# Altium PCB PCB_Control.V03.R00.PcbDoc (part 7 of 7)
Units mm, origin at the board's own origin, x right, y up, seen from the top; angles counter-clockwise.
Board outline 188 x 90 mm, 6 copper layers (Top Layer, GND 1, PWR, Signal L4, GND 2, Bottom Layer), stack 1.548 mm thick; 541 components, 265 nets, 1491 pads, 2159 vias.
Unrouted connection lines stored in the file: 819.
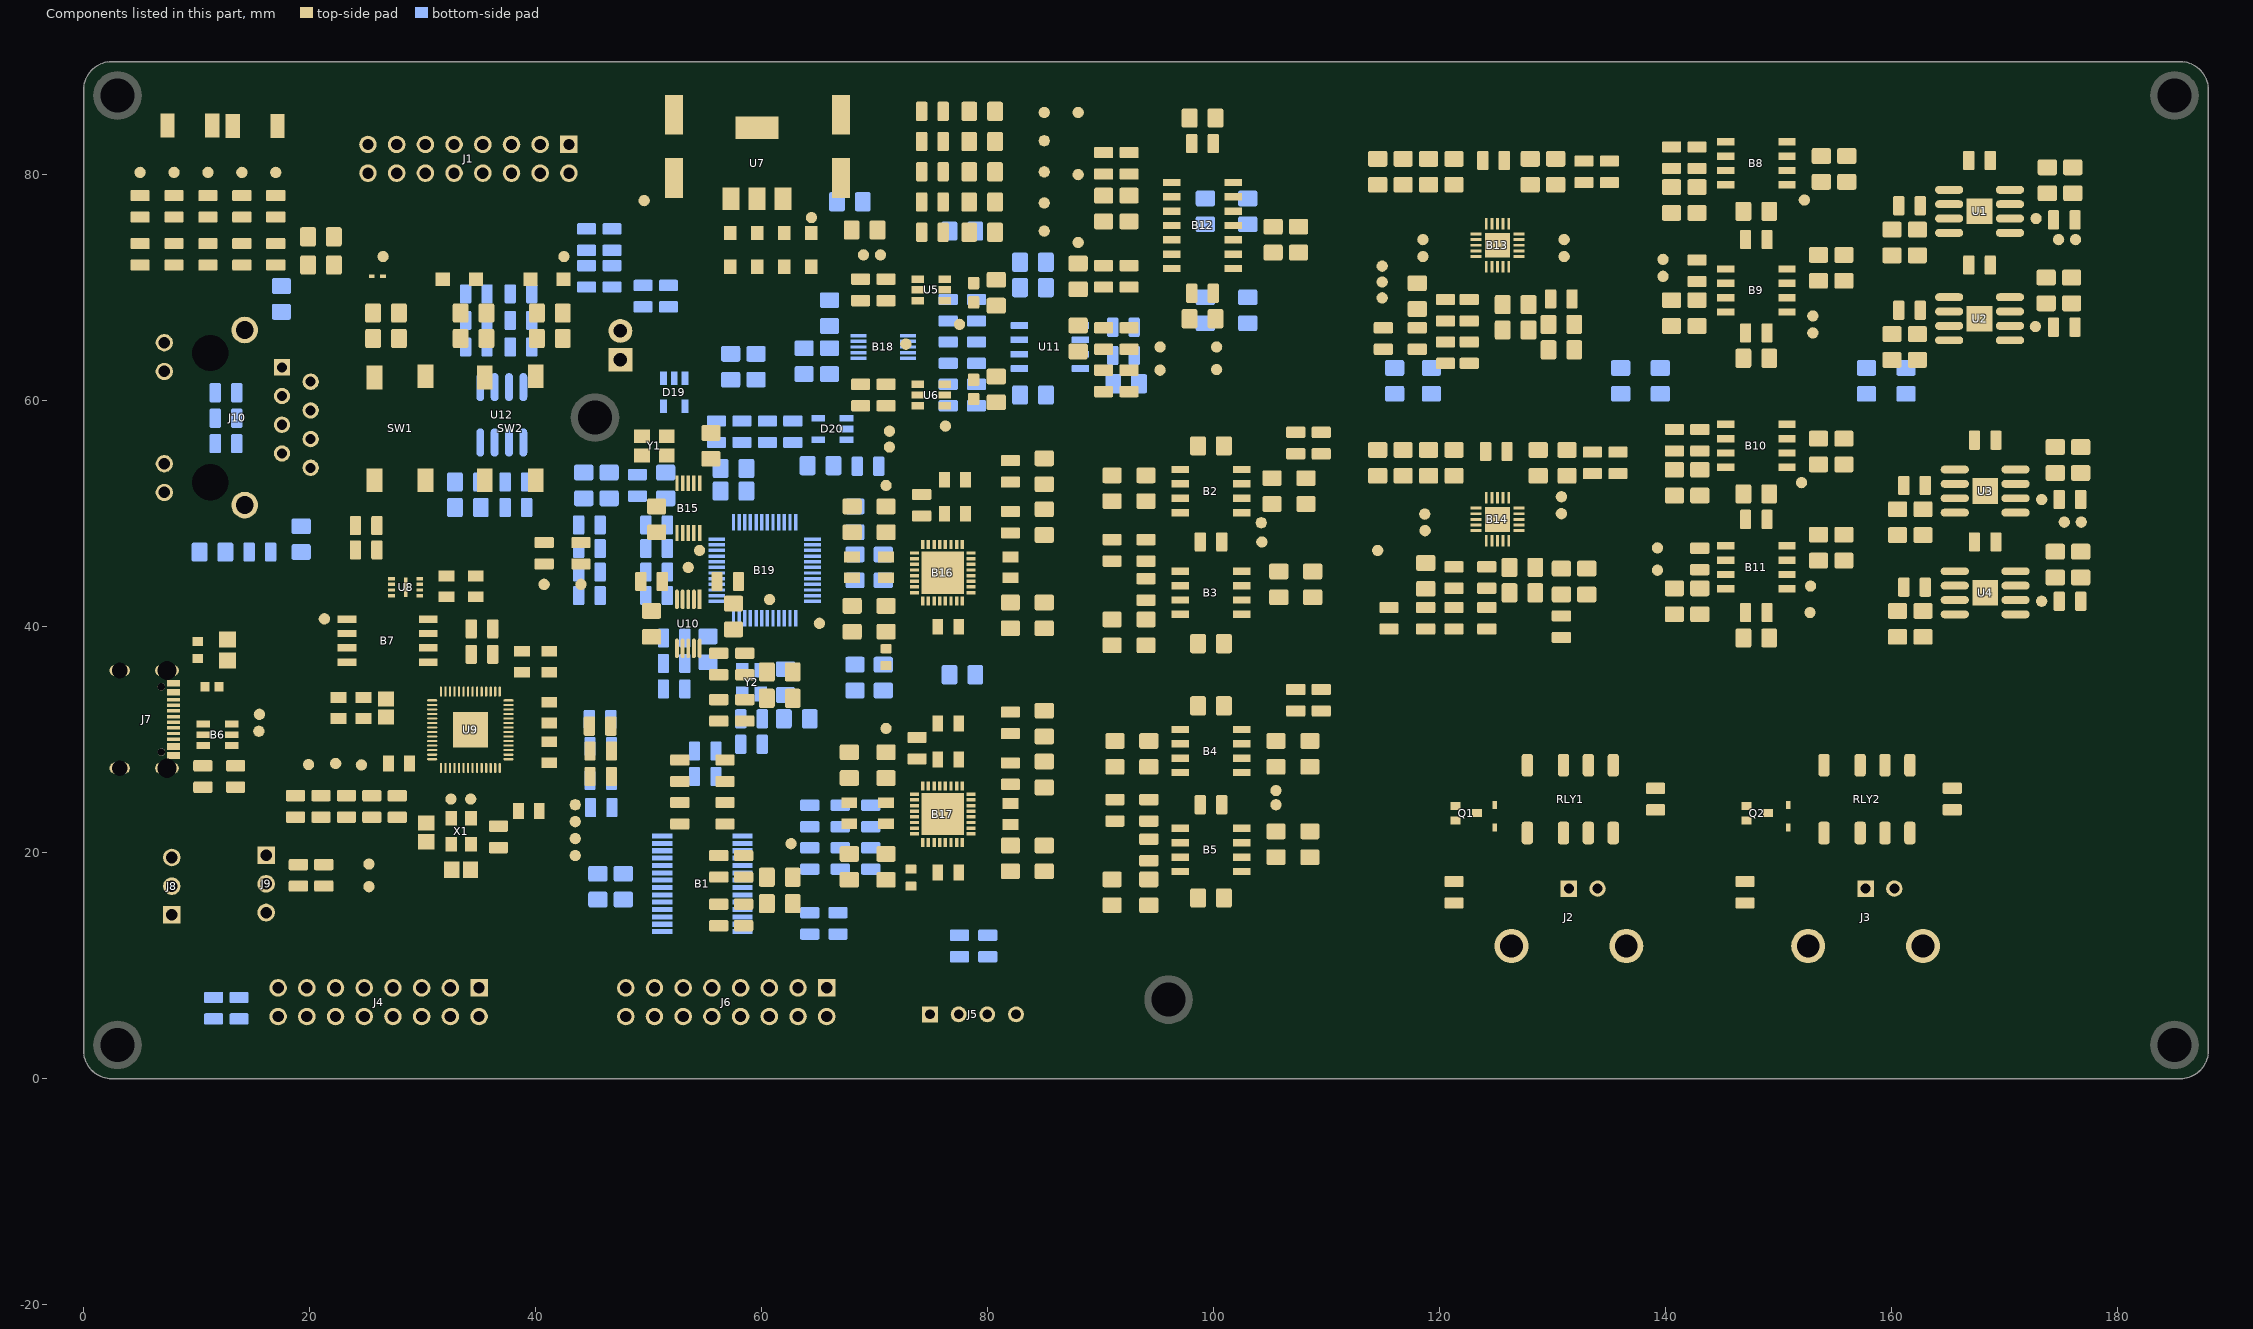
[diagram p10: the components of this part, seen from the top]

## Polygon pours and split planes (outlines as drawn) (continued)
GND on Top Layer "Top Layer-GND 1" (solid, pour order 39): 159.723,23.61 159.808,23.605 159.906,23.585 159.96,23.567 160.015,23.556 160.066,23.531 160.12,23.513 160.167,23.481 160.218,23.456 160.301,23.401 160.344,23.363 160.391,23.332 160.428,23.289 160.471,23.252 160.502,23.204 160.54,23.162 160.595,23.079 160.62,23.028 160.652,22.981 160.67,22.927 160.695,22.876 160.706,22.82 160.725,22.767 160.744,22.669 160.75,22.584 160.761,22.5 160.761,21 160.75,20.916 160.744,20.831 160.725,20.733 160.706,20.68 160.695,20.624 160.67,20.573 160.652,20.519 160.62,20.472 160.595,20.421 160.54,20.338 160.502,20.296 160.471,20.248 160.428,20.211 160.391,20.168 160.344,20.137 160.301,20.099 160.218,20.044 160.167,20.019 160.12,19.987 160.066,19.969 160.015,19.944 159.96,19.933 159.906,19.915 159.834,19.9 159.73,19.732 159.688,19.679 159.651,19.622 159.381,19.306 159.356,19.283 159.335,19.256 158.892,18.814 158.786,18.684 158.709,18.54 158.661,18.383 158.66,18.372 158.826,18.303 159.006,18.166 159.143,17.986 159.23,17.777 159.26,17.553 159.26,16.107 159.23,15.883 159.143,15.674 159.006,15.494 158.826,15.357 158.617,15.27 158.393,15.241 156.947,15.241 156.723,15.27 156.514,15.357 156.334,15.494 156.197,15.674 156.11,15.883 156.081,16.107 156.081,17.553 156.11,17.777 156.197,17.986 156.334,18.166 156.514,18.303 156.706,18.383 156.735,18.68 156.755,18.763 156.768,18.846 156.878,19.206 156.913,19.284 156.943,19.363 157.12,19.695 157.169,19.764 157.214,19.836 157.453,20.127 157.484,20.156 157.51,20.19 157.516,20.195 157.956,20.635 157.967,20.643 158.051,20.746 158.034,20.831 158.029,20.916 158.018,21 158.018,22.5 158.029,22.584 158.034,22.669 158.054,22.767 158.072,22.82 158.083,22.876 158.108,22.927 158.127,22.981 158.158,23.028 158.183,23.079 158.239,23.162 158.276,23.204 158.308,23.252 158.35,23.289 158.388,23.332 158.435,23.363 158.478,23.401 158.56,23.456 158.611,23.481 158.658,23.513 158.712,23.531 158.763,23.556 158.819,23.567 158.873,23.585 158.97,23.605 159.055,23.61 159.139,23.621 159.639,23.621
GND on Top Layer "Top Layer-GND 2" (solid, pour order 36): 518 vertices, not listed, extent 133.968,19.879 179.225,52.977
GND on Top Layer "Top Layer-GND 3" (solid, pour order 35): 489 vertices, not listed, extent 160.218,19.879 181.678,77.727
GND on Top Layer "GND_L01_P034" (solid, remove dead copper, pour order 34): 126,70.1 126.3,69.8 126.5,69.6 126.5,69.4 126.5,64 127,63.5 130.4,63.5 130.9,64 130.9,71.8 130.5,72.2 126,72.2
GND on Top Layer "GND_L01_P026" (solid, remove dead copper, pour order 26): 188,90 0,90 0,87 188,87
GND on Top Layer "GND_L01_P025" (solid, remove dead copper, pour order 25): 188,0 185,0 185,90 188,90
GND on Top Layer "GND_L01_P024" (solid, remove dead copper, pour order 24): 0,0 188,0 188,3 0,3
GND on Bottom Layer "GND_L06_P078" (solid, remove dead copper, pour order 78): 0,90 188,90 188,0 0,0
GND on Bottom Layer "GND_L06_P028" (solid, remove dead copper, pour order 28): 0,0 188,0 188,3 0,3
GND on Bottom Layer "GND_L06_P027" (solid, pour order 27): 0,0 3,0 3,91 0,91
GND on Bottom Layer "GND_L06_P030" (solid, remove dead copper, pour order 30): 188,90 0,90 0,87 188,87
GND on Bottom Layer "GND_L06_P029" (solid, remove dead copper, pour order 29): 188,0 185,0 185,90 188,90
+A5V on PWR "+A5V_L03_P068" (solid, remove dead copper, pour order 68): 154.5,26 152.5,26 150,23.5 150,3 101.1,3 101.1,31 102.6,32.5 129.5,32.5 129.5,27 127.5,25 112.5,25 108.5,21 105,17.5 105,7.5 106.5,6 146,6 147.5,7.5 147.5,26 150.5,29 156,29 156,27.5
+A5V on PWR "+A5V_L03_P066" (solid, remove dead copper, pour order 66): 134.994,76.494 134.994,81.694 135.8,82.5 159.5,82.5 159.5,70 156,66.5 156,29 151.5,29 147.5,25 147.5,79.6 140.1,79.6 139.8,79.3 139.8,40.8 136.5,37.5 103.5,37.5 100.5,40.5 100.5,72.5 106.5,72.5 106.5,63 107.5,62 118.7,62 119.3,62.6 119.3,64.5 118,65.8 118,72.5 120,74.5 133,74.5
+3V3 on PWR "+3V3_L03_P071" (solid, remove dead copper, pour order 71): 18.473,62.973 13.696,67.75 3.25,67.75 3.25,54 4.5,52.75 16.75,52.75 18,51.5 18,23 12,17 12,10.5 72,10.5 72,61.5 56.5,61.5 53.5,58.5 42,58.5 37.5,63 18.5,63
-A15V on PWR "-A15V_L03_P067" (solid, remove dead copper, pour order 67): 156,37.5 167.5,37.5 167.5,84.5 103.5,84.5 101.5,82.5 101.5,77 99.5,75 75.5,75 75.5,72.75 106.5,72.75 106.5,63 107.5,62 119.3,62 119.3,79.8 121.5,82 159.5,82 159.5,69.743 156,66.243
-A5V on PWR "-A5V_L03_P065" (solid, remove dead copper, pour order 65): 88,13.5 100.7,13.5 100.7,29.8 103.4,32.5 147.5,32.5 147.5,79.5 140.5,79.5 139.5,78.5 139.5,40 137,37.5 103,37.5 101.1,39.4 101.1,72.5 96,72.5 94.5,71 94.5,55.5 90,55.5 88,53.5
+A15V on PWR "+A15V_L03_P045" (solid, remove dead copper, pour order 45): 179,43.5 168,43.5 168,84.5 103.5,84.5 101.5,82.5 101.5,77 99.5,75 75.5,75 75.5,78.5 92.5,78.5 92.5,87 179,87
+A3V3 on PWR "+A3V3_L03_P069" (solid, remove dead copper, pour order 69): 87.8,53.5 89.9,55.6 93.1,55.6 94.3,56.8 94.3,61 77,61 74,58 74,36.5 77.5,36.5 79.5,38.5 79.5,49 80.5,50 83,50 83,36.5 78.5,32 75.5,32 74,30.5 74,21 75,20 75,17.5 79.5,17.5 79.5,26.5 81,28 83.5,28 87.8,32.3
+A3V3 on PWR "+A3V3_L03_P055" (solid, remove dead copper, pour order 55): 75.5,87 92.25,87 92.25,78.75 87,78.75 87,84 75.5,84
+A5V on PWR "+A5V_L03_P053" (solid, remove dead copper, pour order 53): 75.5,84 87,84 87,81 75.5,81
-A5V on PWR "-A5V_L03_P054" (solid, remove dead copper, pour order 54): 75.5,81 87,81 87,78.5 75.5,78.5
+A15V on Signal L4 "+A15V_L04_P064" (solid, remove dead copper, pour order 64): 114,63.8 174,63.8 174,58.8 114,58.8
+A5V on Signal L4 "+A5V_L04_P070" (solid, remove dead copper, pour order 70): 84,67 105,67 106,68 106,70 105,71 93,71 91.5,72.5 91.5,81.5 90,83 84,83
GND on GND 1 "GND_L02_P082" (solid, remove dead copper, pour order 82): -2.5,90 190,90 190,0 -2.5,0
GND on GND 2 "GND_L05_P083" (solid, remove dead copper, pour order 83): -2.5,92.5 190,92.5 190,-2.5 -2.5,-2.5

## Silkscreen, mask and mechanical layers (free items; w line width, h text height)
Top Overlay:
  circle w0.254: c45.25,58.5 r3
  circle w0.254: c96,7 r3.506
  lines w0.254: 120,3 120,29 142,29 142,4 142,3 ; 146.25,3 146.25,29 168.25,29 168.25,4
  text "BOOT" at 26.75,49.25 h1.52
  text "RESET" at 35.25,49.25 h1.52
  text "ETH" at 16.25,47.75 h1.52
  text "CH2" at 116.5,27.517 h1.52
  text "CH1" at 169.2,27.517 h1.52
  text "USB-C" at 3.75,25.018 h1.52
  text "SWD" at 8.968,18.85 h1.52
  text "GND" at 8.968,16.278 h1.52
  text "SWCLK" at 8.968,13.75 h1.52
  text "+5V" at 75.603,8.003 h1.52 r90
  text "TX" at 78.167,8.012 h1.52 r90
  text "RX" at 80.721,8.012 h1.52 r90
  text "GND" at 83.294,7.994 h1.52 r90
  text "GENERADOR DE FUNCIONES ARBITRARIAS /  / PCB - CONTROL V03.R00 /  / AGUSTIN M. ZULIANI" at 100,4 h1.52
Bottom Overlay:
  rectangle: 134,35.5 163,55.5
  text "GND" at 27.311,84.5 h1 r270
  text "+3V3" at 29.761,84.5 h1 r270
  text "GND" at 32.411,84.5 h1 r270
  text "-15V" at 35.011,84.5 h1 r270
  text "GND" at 37.511,84.5 h1 r270
  text "+15V" at 40.011,84.5 h1 r270
  text "GND" at 42.611,84.5 h1 r270
  text "GND" at 27.311,76.6 h1 r270
  text "+3V3" at 29.911,76.6 h1 r270
  text "GND" at 32.411,76.6 h1 r270
  text "-5V" at 35.011,76.6 h1 r270
  text "GND" at 37.511,76.6 h1 r270
  text "+5V" at 40.011,76.6 h1 r270
  text "GND" at 42.711,76.6 h1 r270
  text "GENERADOR DE FUNCIONES ARBITRARIAS /  / PCB - CONTROL V03.R00 /  / AGUSTIN M. ZULIANI" at 131.25,28.4 h1.52
  text "UART0_TX" at 25.5,19 h1.52
  text "GND" at 25.5,16.5 h1.52
  text "UART0_RX" at 25.5,13.75 h1.52
  text "LCD_RS" at 16.928,9.25 h1 r270
  text "CS_LCD" at 19.428,9.25 h1 r270
  text "SCLK" at 22.011,9.25 h1 r270
  text "MISO" at 24.511,9.25 h1 r270
  text "MOSI" at 27.011,9.25 h1 r270
  text "+3V3" at 29.511,9.25 h1 r270
  text "GND" at 32.011,9.25 h1 r270
  text "+5V" at 34.511,9.25 h1 r270
  text "ENC_A" at 57.778,9.1 h1 r270
  text "BUZZER" at 60.311,9.1 h1 r270
  text "PULS15" at 62.911,9.1 h1 r270
  text "ENC_B" at 55.278,9 h1 r270
  text "PULS14" at 70.2,7.711 h1
  text "PULS5" at 22.011,1.5 h1 r270
  text "PULS4" at 24.511,1.5 h1 r270
  text "PULS3" at 27.011,1.5 h1 r270
  text "PULS2" at 29.511,1.5 h1 r270
  text "PULS1" at 32.261,1.5 h1 r270
  text "PULS0" at 34.761,1.5 h1 r270
  text "PULS12" at 50.211,1.3 h1 r270
  text "PULS11" at 52.711,1.3 h1 r270
  text "PULS10" at 55.311,1.3 h1 r270
  text "PULS09" at 57.811,1.3 h1 r270
  text "PULS08" at 60.411,1.3 h1 r270
  text "PULS07" at 62.811,1.3 h1 r270
  text "PULS06" at 65.411,1.3 h1 r270
  text "PULS13" at 47.611,1.2 h1 r270
  text "LCB_BCL" at 19.428,0.55 h1 r270
  text "LCD_RST" at 16.928,0.5 h1 r270
Top Solder:
  region: 188,0 181,0 181,3 185,7 188,7
  region: 188,90 188,83 185,83 181,87 181,90
  region: 0,90 7,90 7,87 3,83 0,83
  region: 0,0 0,7 3,7 7,3 7,0
  lines w6: 0,5 ccw(c5,5) 5,0 183.003,0 ccw(c183.003,5) 188.003,5 188.003,85.003 ccw(c183.003,85.003) 183.003,90.003 5,90.003 ccw(c5,85.003) 0,85.003 0,5
Bottom Solder:
  region: 188,-0.334 181,-0.334 181,3 185,7 188,7
  region: 188.334,90 188.334,83 185,83 181,87 181,90
  region: -0.5,90 7,90 7,87 2.5,82.5 -0.5,82.5
  region: -0.334,0 -0.334,7.5 2.5,7.5 7,3 7,0
  lines w6: -0.25,5 ccw(c4.75,5) 4.75,0 183.003,0 ccw(c183.003,5) 188.003,5 188.003,85.002 ccw(c183.003,85.002) 183.003,90.002 4.75,90.002 ccw(c4.75,85.002) -0.25,85.002 -0.25,5
Mechanical 1:
  the board outline again, w0.254

## Text inside footprints (layer, text, board x,y; h text height)
C67: Top Overlay "+" at 78.375,72.05 h0.75 r270; Mechanical 13 "+" at 79.75,70.883 h1 r270
C69: Top Overlay "+" at 78.375,63.5 h0.75 r270; Mechanical 13 "+" at 79.75,62.333 h1 r270
C70: Top Overlay "+" at 66.5,77.65 h0.75 r270
C71: Top Overlay "+" at 51.75,77.65 h0.75 r270
D5: Mechanical 13 "+" at 16,74.717 h1 r90
D6: Mechanical 13 "+" at 13,74.717 h1 r90
D7: Mechanical 13 "+" at 10,74.717 h1 r90
D8: Mechanical 13 "+" at 9,71.183 h1 r270
D9: Mechanical 13 "+" at 6,71.183 h1 r270
D13: Mechanical 13 "+" at 51.75,25.267 h1 r90
D14: Mechanical 13 "+" at 55.75,25.267 h1 r90